# EAGLE board Qwiic_Accelerometer_LIS2DH12-Panel (EAGLE 9.4.2), part 1 of 2
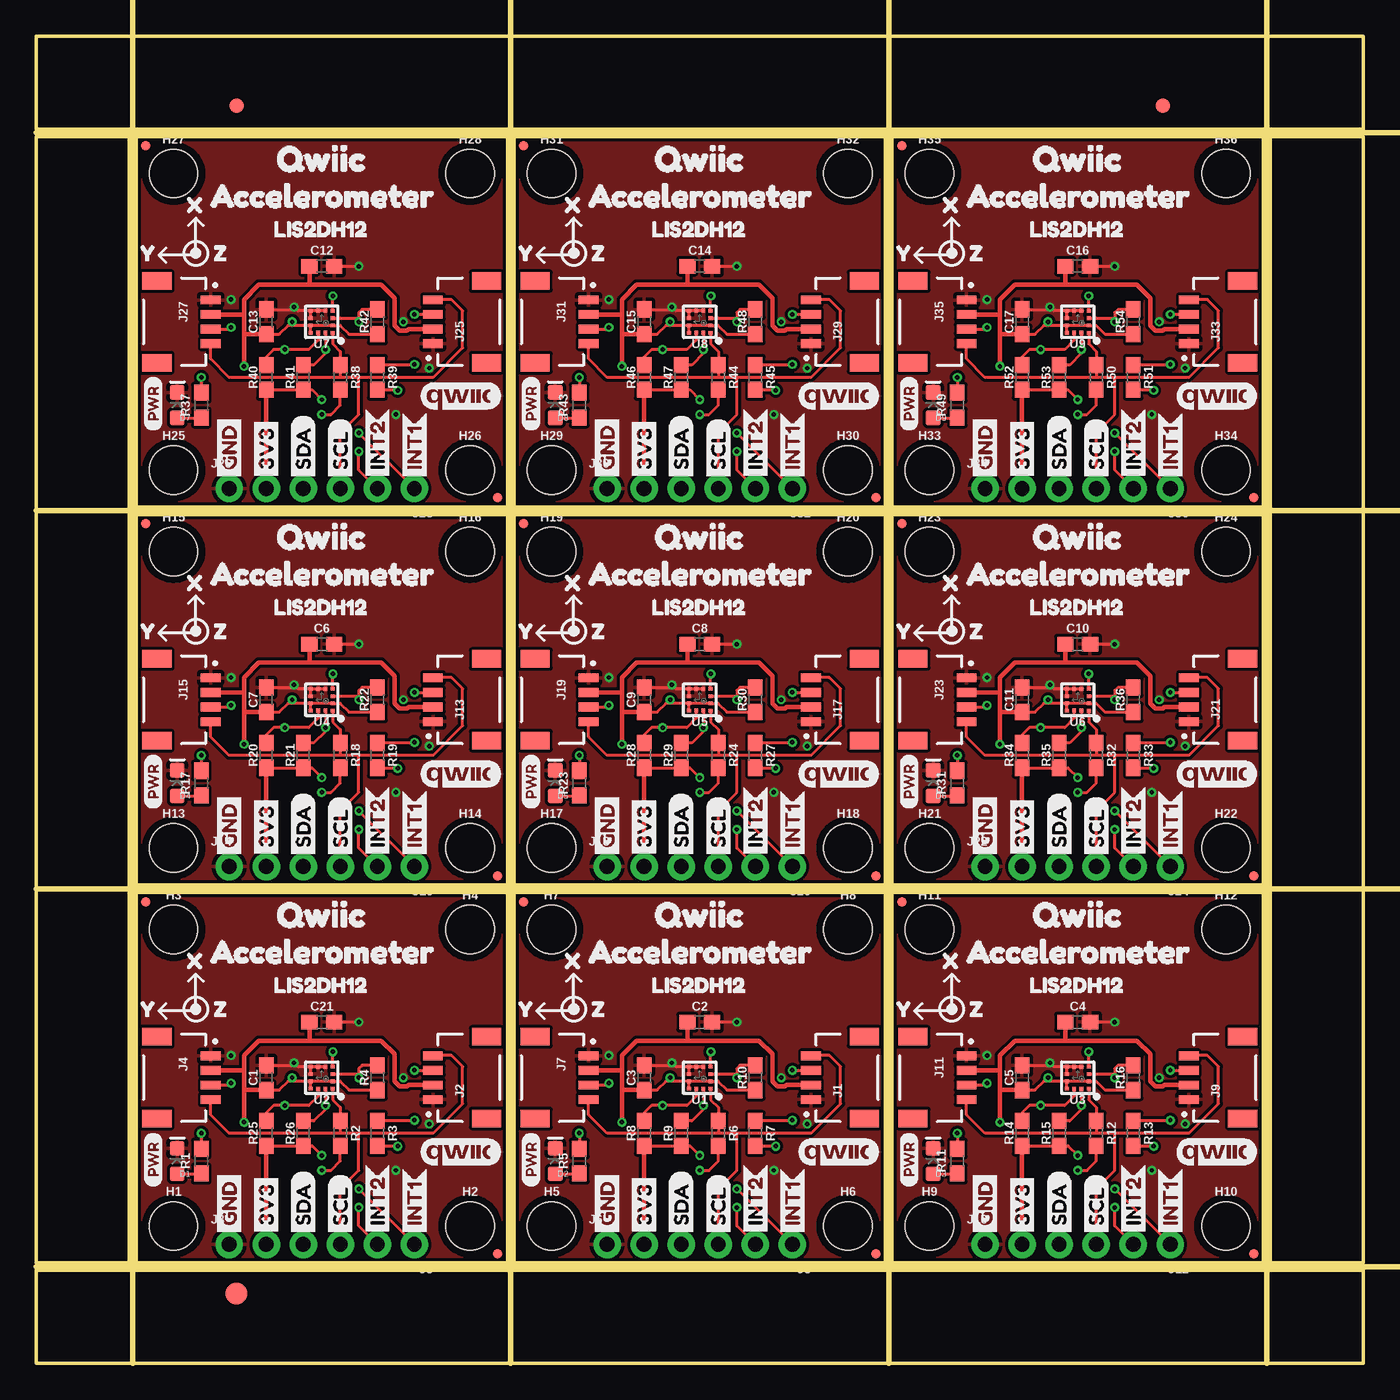
[diagram p0: board, top side]
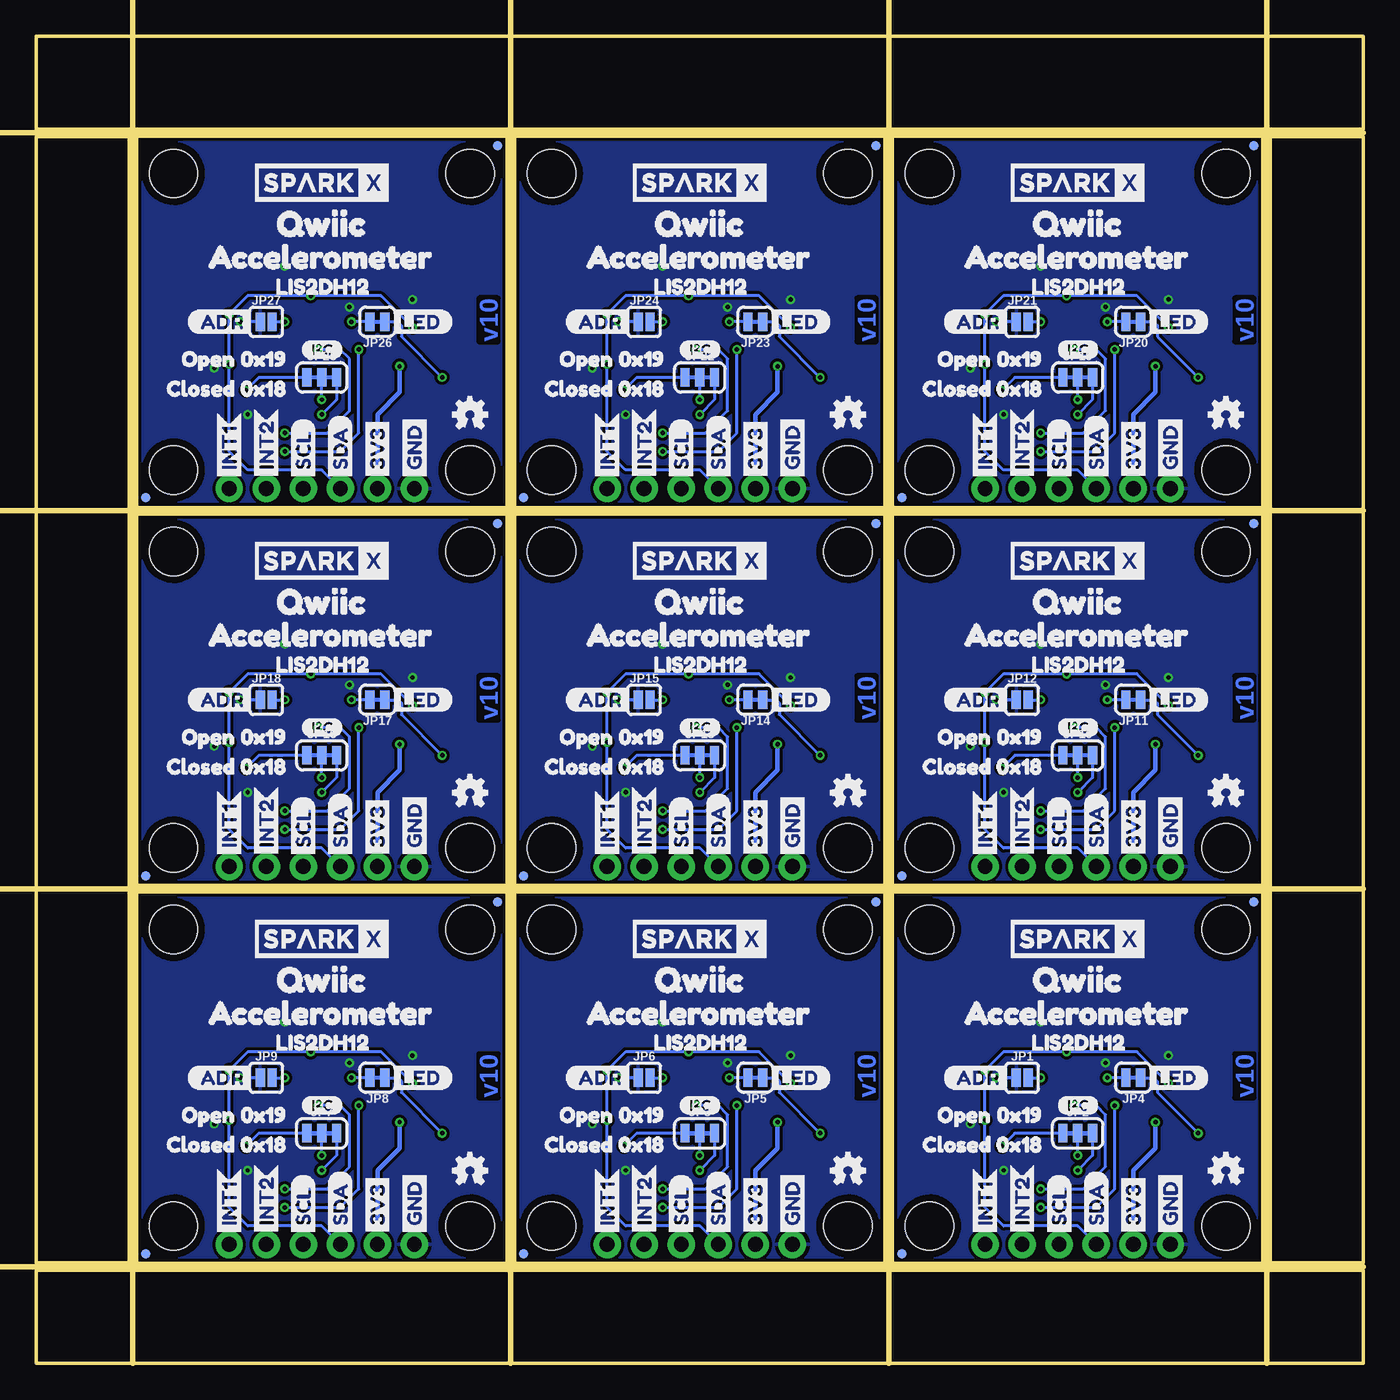
[diagram p1: board, bottom side, seen from below]

Size 90.93 x 90.93 mm. Coordinates in mm from the lower left corner, seen from the top.
Outline: 32.26,6.86 6.86,6.86 6.86,32.26 32.26,32.26 32.26,6.86
Outline: 58.17,6.86 32.77,6.86 32.77,32.26 58.17,32.26 58.17,6.86
Outline: 84.07,6.86 58.67,6.86 58.67,32.26 84.07,32.26 84.07,6.86
Outline: 32.26,32.77 6.86,32.77 6.86,58.17 32.26,58.17 32.26,32.77
Outline: 58.17,32.77 32.77,32.77 32.77,58.17 58.17,58.17 58.17,32.77
Outline: 84.07,32.77 58.67,32.77 58.67,58.17 84.07,58.17 84.07,32.77
Outline: 32.26,58.67 6.86,58.67 6.86,84.07 32.26,84.07 32.26,58.67
Outline: 58.17,58.67 32.77,58.67 32.77,84.07 58.17,84.07 58.17,58.67
Outline: 84.07,58.67 58.67,58.67 58.67,84.07 84.07,84.07 84.07,58.67
Outline: 0,6.35 90.93,6.35 90.93,0 0,0 0,6.35
Outline: 84.58,84.07 90.93,84.07 90.93,6.86 84.58,6.86 84.58,84.07
Outline: 0,90.93 90.93,90.93 90.93,84.58 0,84.58 0,90.93
Outline: 0,84.07 6.35,84.07 6.35,6.86 0,6.86 0,84.07
Copper layers (1*16): Top 0.035mm / dielectric 1.5mm / Bottom 0.035mm
Design rules "SparkFun-2-layer-PCBWay-LIMIT": minimum track width 6mil, minimum drill 0.3mm, track to track 6mil, track to pad 6mil, pad to pad 6mil, via to via 6mil, smd to smd 6mil, copper to edge 6mil, drill to drill 6mil, minimum pad ring 6mil, minimum via ring 6mil, stop-mask expansion 4mil, vias tented up to drill 25mil, thermal gap 10mil
Milling: 8 lines

## Footprints (pad centres in the part's own frame; a part is rotated, then mirrored left to right if it is on the bottom)
0603 = smd 1.1 x 1: 1 -0.85,0; 2 0.85,0
LED-0603 = smd 1 x 1: A -0.877,0; C 0.877,0
FIDUCIAL-1X2 = smd 1 x 1: 1 0,0
FIDUCIAL-1.5X3 = smd 1.5 x 1.5: 1 0,0
FIDUCIAL-MICRO = smd 0.635 x 0.635: 1 0,0
STAND-OFF = hole 3.302: 0,0
JST04_1MM_RA = smd 0.6 x 1.35: 1 -1.5,0; 2 -0.5,0; 3 0.5,0; 4 1.5,0 | smd 1.2 x 2: NC1 2.8,-3.675; NC2 -2.8,-3.675
1X04_NO_SILK = drill 1.016 pad 1.88: 1 0,0; 2 2.54,0; 3 5.08,0; 4 7.62,0
1X02_NO_SILK = drill 1.016 pad 1.88: 1 0,0; 2 2.54,0
SMT-JUMPER_2_NO_SILK = smd 0.635 x 1.27: 1 -0.406,0; 2 0.406,0
SMT-JUMPER_3_2-NC_TRACE_SILK = smd 0.635 x 1.27: 1 -1.016,0; 2 0,0; 3 1.016,0
SMT-JUMPER_2_NC_TRACE_SILK = smd 0.635 x 1.27: 1 -0.508,0; 2 0.508,0
LGA-12-LISDH12 = smd 0.275 x 0.25: 1 -0.75,0.75; 2 -0.75,0.25; 3 -0.75,-0.25; 4 -0.75,-0.75; 7 0.75,-0.75; 8 0.75,-0.25; 9 0.75,0.25; 10 0.75,0.75 | smd 0.25 x 0.275: 5 -0.25,-0.75; 6 0.25,-0.75; 11 0.25,0.75; 12 -0.25,0.75

## Placement (x,y rotation side)
C1  0.1uF  [0603]  15.75,19.56 90 top
C2  10uF  [0603]  45.47,23.37 0 top
C3  0.1uF  [0603]  41.66,19.56 90 top
C4  10uF  [0603]  71.37,23.37 0 top
C5  0.1uF  [0603]  67.56,19.56 90 top
C6  10uF  [0603]  19.56,49.28 0 top
C7  0.1uF  [0603]  15.75,45.47 90 top
C8  10uF  [0603]  45.47,49.28 0 top
C9  0.1uF  [0603]  41.66,45.47 90 top
C10  10uF  [0603]  71.37,49.28 0 top
C11  0.1uF  [0603]  67.56,45.47 90 top
C12  10uF  [0603]  19.56,75.18 0 top
C13  0.1uF  [0603]  15.75,71.37 90 top
C14  10uF  [0603]  45.47,75.18 0 top
C15  0.1uF  [0603]  41.66,71.37 90 top
C16  10uF  [0603]  71.37,75.18 0 top
C17  0.1uF  [0603]  67.56,71.37 90 top
C21  10uF  [0603]  19.56,23.37 0 top
D1  RED  [LED-0603]  9.65,13.84 90 top
D2  RED  [LED-0603]  35.56,13.84 90 top
D3  RED  [LED-0603]  61.47,13.84 90 top
D4  RED  [LED-0603]  9.65,39.75 90 top
D5  RED  [LED-0603]  35.56,39.75 90 top
D6  RED  [LED-0603]  61.47,39.75 90 top
D7  RED  [LED-0603]  9.65,65.66 90 top
D8  RED  [LED-0603]  35.56,65.66 90 top
D9  RED  [LED-0603]  61.47,65.66 90 top
E$1  [FIDUCIAL-1X2]  13.72,86.17 0 top
E$2  [FIDUCIAL-1X2]  77.22,86.17 0 top
E$3  [FIDUCIAL-1.5X3]  13.72,4.76 0 top
FD1  FIDUCIALUFIDUCIAL  [FIDUCIAL-MICRO]  7.49,31.62 0 top
FD2  FIDUCIALUFIDUCIAL  [FIDUCIAL-MICRO]  31.62,7.49 0 top
FD3  FIDUCIALUFIDUCIAL  [FIDUCIAL-MICRO]  31.62,7.49 0 bottom
FD4  FIDUCIALUFIDUCIAL  [FIDUCIAL-MICRO]  7.49,31.62 0 bottom
FD5  FIDUCIALUFIDUCIAL  [FIDUCIAL-MICRO]  33.4,31.62 0 top
FD6  FIDUCIALUFIDUCIAL  [FIDUCIAL-MICRO]  57.53,7.49 0 top
FD7  FIDUCIALUFIDUCIAL  [FIDUCIAL-MICRO]  57.53,7.49 0 bottom
FD8  FIDUCIALUFIDUCIAL  [FIDUCIAL-MICRO]  33.4,31.62 0 bottom
FD9  FIDUCIALUFIDUCIAL  [FIDUCIAL-MICRO]  59.31,31.62 0 top
FD10  FIDUCIALUFIDUCIAL  [FIDUCIAL-MICRO]  83.44,7.49 0 top
FD11  FIDUCIALUFIDUCIAL  [FIDUCIAL-MICRO]  83.44,7.49 0 bottom
FD12  FIDUCIALUFIDUCIAL  [FIDUCIAL-MICRO]  59.31,31.62 0 bottom
FD13  FIDUCIALUFIDUCIAL  [FIDUCIAL-MICRO]  7.49,57.53 0 top
FD14  FIDUCIALUFIDUCIAL  [FIDUCIAL-MICRO]  31.62,33.4 0 top
FD15  FIDUCIALUFIDUCIAL  [FIDUCIAL-MICRO]  31.62,33.4 0 bottom
FD16  FIDUCIALUFIDUCIAL  [FIDUCIAL-MICRO]  7.49,57.53 0 bottom
FD17  FIDUCIALUFIDUCIAL  [FIDUCIAL-MICRO]  33.4,57.53 0 top
FD18  FIDUCIALUFIDUCIAL  [FIDUCIAL-MICRO]  57.53,33.4 0 top
FD19  FIDUCIALUFIDUCIAL  [FIDUCIAL-MICRO]  57.53,33.4 0 bottom
FD20  FIDUCIALUFIDUCIAL  [FIDUCIAL-MICRO]  33.4,57.53 0 bottom
FD21  FIDUCIALUFIDUCIAL  [FIDUCIAL-MICRO]  59.31,57.53 0 top
FD22  FIDUCIALUFIDUCIAL  [FIDUCIAL-MICRO]  83.44,33.4 0 top
FD23  FIDUCIALUFIDUCIAL  [FIDUCIAL-MICRO]  83.44,33.4 0 bottom
FD24  FIDUCIALUFIDUCIAL  [FIDUCIAL-MICRO]  59.31,57.53 0 bottom
FD25  FIDUCIALUFIDUCIAL  [FIDUCIAL-MICRO]  7.49,83.44 0 top
FD26  FIDUCIALUFIDUCIAL  [FIDUCIAL-MICRO]  31.62,59.31 0 top
FD27  FIDUCIALUFIDUCIAL  [FIDUCIAL-MICRO]  31.62,59.31 0 bottom
FD28  FIDUCIALUFIDUCIAL  [FIDUCIAL-MICRO]  7.49,83.44 0 bottom
FD29  FIDUCIALUFIDUCIAL  [FIDUCIAL-MICRO]  33.4,83.44 0 top
FD30  FIDUCIALUFIDUCIAL  [FIDUCIAL-MICRO]  57.53,59.31 0 top
FD31  FIDUCIALUFIDUCIAL  [FIDUCIAL-MICRO]  57.53,59.31 0 bottom
FD32  FIDUCIALUFIDUCIAL  [FIDUCIAL-MICRO]  33.4,83.44 0 bottom
FD33  FIDUCIALUFIDUCIAL  [FIDUCIAL-MICRO]  59.31,83.44 0 top
FD34  FIDUCIALUFIDUCIAL  [FIDUCIAL-MICRO]  83.44,59.31 0 top
FD35  FIDUCIALUFIDUCIAL  [FIDUCIAL-MICRO]  83.44,59.31 0 bottom
FD36  FIDUCIALUFIDUCIAL  [FIDUCIAL-MICRO]  59.31,83.44 0 bottom
H1  STAND-OFF  [STAND-OFF]  9.4,9.4 0 top
H2  STAND-OFF  [STAND-OFF]  29.72,9.4 0 top
H3  STAND-OFF  [STAND-OFF]  9.4,29.72 0 top
H4  STAND-OFF  [STAND-OFF]  29.72,29.72 0 top
H5  STAND-OFF  [STAND-OFF]  35.31,9.4 0 top
H6  STAND-OFF  [STAND-OFF]  55.63,9.4 0 top
H7  STAND-OFF  [STAND-OFF]  35.31,29.72 0 top
H8  STAND-OFF  [STAND-OFF]  55.63,29.72 0 top
H9  STAND-OFF  [STAND-OFF]  61.21,9.4 0 top
H10  STAND-OFF  [STAND-OFF]  81.53,9.4 0 top
H11  STAND-OFF  [STAND-OFF]  61.21,29.72 0 top
H12  STAND-OFF  [STAND-OFF]  81.53,29.72 0 top
H13  STAND-OFF  [STAND-OFF]  9.4,35.31 0 top
H14  STAND-OFF  [STAND-OFF]  29.72,35.31 0 top
H15  STAND-OFF  [STAND-OFF]  9.4,55.63 0 top
H16  STAND-OFF  [STAND-OFF]  29.72,55.63 0 top
H17  STAND-OFF  [STAND-OFF]  35.31,35.31 0 top
H18  STAND-OFF  [STAND-OFF]  55.63,35.31 0 top
H19  STAND-OFF  [STAND-OFF]  35.31,55.63 0 top
H20  STAND-OFF  [STAND-OFF]  55.63,55.63 0 top
H21  STAND-OFF  [STAND-OFF]  61.21,35.31 0 top
H22  STAND-OFF  [STAND-OFF]  81.53,35.31 0 top
H23  STAND-OFF  [STAND-OFF]  61.21,55.63 0 top
H24  STAND-OFF  [STAND-OFF]  81.53,55.63 0 top
H25  STAND-OFF  [STAND-OFF]  9.4,61.21 0 top
H26  STAND-OFF  [STAND-OFF]  29.72,61.21 0 top
H27  STAND-OFF  [STAND-OFF]  9.4,81.53 0 top
H28  STAND-OFF  [STAND-OFF]  29.72,81.53 0 top
H29  STAND-OFF  [STAND-OFF]  35.31,61.21 0 top
H30  STAND-OFF  [STAND-OFF]  55.63,61.21 0 top
H31  STAND-OFF  [STAND-OFF]  35.31,81.53 0 top
H32  STAND-OFF  [STAND-OFF]  55.63,81.53 0 top
H33  STAND-OFF  [STAND-OFF]  61.21,61.21 0 top
H34  STAND-OFF  [STAND-OFF]  81.53,61.21 0 top
H35  STAND-OFF  [STAND-OFF]  61.21,81.53 0 top
H36  STAND-OFF  [STAND-OFF]  81.53,81.53 0 top
J1  Qwiic Right Angle  [JST04_1MM_RA]  53.09,19.56 90 top
J2  Qwiic Right Angle  [JST04_1MM_RA]  27.18,19.56 90 top
J3  PTH  [1X04_NO_SILK]  13.21,8.13 0 top
J4  Qwiic Right Angle  [JST04_1MM_RA]  11.94,19.56 270 top
J5  [1X02_NO_SILK]  25.91,8.13 180 top
J6  PTH  [1X04_NO_SILK]  39.12,8.13 0 top
J7  Qwiic Right Angle  [JST04_1MM_RA]  37.85,19.56 270 top
J8  [1X02_NO_SILK]  51.82,8.13 180 top
J9  Qwiic Right Angle  [JST04_1MM_RA]  78.99,19.56 90 top
J10  PTH  [1X04_NO_SILK]  65.02,8.13 0 top
J11  Qwiic Right Angle  [JST04_1MM_RA]  63.75,19.56 270 top
J12  [1X02_NO_SILK]  77.72,8.13 180 top
J13  Qwiic Right Angle  [JST04_1MM_RA]  27.18,45.47 90 top
J14  PTH  [1X04_NO_SILK]  13.21,34.04 0 top
J15  Qwiic Right Angle  [JST04_1MM_RA]  11.94,45.47 270 top
J16  [1X02_NO_SILK]  25.91,34.04 180 top
J17  Qwiic Right Angle  [JST04_1MM_RA]  53.09,45.47 90 top
J18  PTH  [1X04_NO_SILK]  39.12,34.04 0 top
J19  Qwiic Right Angle  [JST04_1MM_RA]  37.85,45.47 270 top
J20  [1X02_NO_SILK]  51.82,34.04 180 top
J21  Qwiic Right Angle  [JST04_1MM_RA]  78.99,45.47 90 top
J22  PTH  [1X04_NO_SILK]  65.02,34.04 0 top
J23  Qwiic Right Angle  [JST04_1MM_RA]  63.75,45.47 270 top
J24  [1X02_NO_SILK]  77.72,34.04 180 top
J25  Qwiic Right Angle  [JST04_1MM_RA]  27.18,71.37 90 top
J26  PTH  [1X04_NO_SILK]  13.21,59.94 0 top
J27  Qwiic Right Angle  [JST04_1MM_RA]  11.94,71.37 270 top
J28  [1X02_NO_SILK]  25.91,59.94 180 top
J29  Qwiic Right Angle  [JST04_1MM_RA]  53.09,71.37 90 top
J30  PTH  [1X04_NO_SILK]  39.12,59.94 0 top
J31  Qwiic Right Angle  [JST04_1MM_RA]  37.85,71.37 270 top
J32  [1X02_NO_SILK]  51.82,59.94 180 top
J33  Qwiic Right Angle  [JST04_1MM_RA]  78.99,71.37 90 top
J34  PTH  [1X04_NO_SILK]  65.02,59.94 0 top
J35  Qwiic Right Angle  [JST04_1MM_RA]  63.75,71.37 270 top
J36  [1X02_NO_SILK]  77.72,59.94 180 top
JP1  [SMT-JUMPER_2_NO_SILK]  23.37,19.56 0 bottom
JP2  I2C  [SMT-JUMPER_3_2-NC_TRACE_SILK]  19.56,15.75 0 bottom
JP3  I2C  [SMT-JUMPER_3_2-NC_TRACE_SILK]  45.47,15.75 0 bottom
JP4  [SMT-JUMPER_2_NC_TRACE_SILK]  15.75,19.56 180 bottom
JP5  [SMT-JUMPER_2_NC_TRACE_SILK]  41.66,19.56 180 bottom
JP6  [SMT-JUMPER_2_NO_SILK]  49.28,19.56 0 bottom
JP7  I2C  [SMT-JUMPER_3_2-NC_TRACE_SILK]  71.37,15.75 0 bottom
JP8  [SMT-JUMPER_2_NC_TRACE_SILK]  67.56,19.56 180 bottom
JP9  [SMT-JUMPER_2_NO_SILK]  75.18,19.56 0 bottom
JP10  I2C  [SMT-JUMPER_3_2-NC_TRACE_SILK]  19.56,41.66 0 bottom
JP11  [SMT-JUMPER_2_NC_TRACE_SILK]  15.75,45.47 180 bottom
JP12  [SMT-JUMPER_2_NO_SILK]  23.37,45.47 0 bottom
JP13  I2C  [SMT-JUMPER_3_2-NC_TRACE_SILK]  45.47,41.66 0 bottom
JP14  [SMT-JUMPER_2_NC_TRACE_SILK]  41.66,45.47 180 bottom
JP15  [SMT-JUMPER_2_NO_SILK]  49.28,45.47 0 bottom
JP16  I2C  [SMT-JUMPER_3_2-NC_TRACE_SILK]  71.37,41.66 0 bottom
JP17  [SMT-JUMPER_2_NC_TRACE_SILK]  67.56,45.47 180 bottom
JP18  [SMT-JUMPER_2_NO_SILK]  75.18,45.47 0 bottom
JP19  I2C  [SMT-JUMPER_3_2-NC_TRACE_SILK]  19.56,67.56 0 bottom
JP20  [SMT-JUMPER_2_NC_TRACE_SILK]  15.75,71.37 180 bottom
JP21  [SMT-JUMPER_2_NO_SILK]  23.37,71.37 0 bottom
JP22  I2C  [SMT-JUMPER_3_2-NC_TRACE_SILK]  45.47,67.56 0 bottom
JP23  [SMT-JUMPER_2_NC_TRACE_SILK]  41.66,71.37 180 bottom
JP24  [SMT-JUMPER_2_NO_SILK]  49.28,71.37 0 bottom
JP25  I2C  [SMT-JUMPER_3_2-NC_TRACE_SILK]  71.37,67.56 0 bottom
JP26  [SMT-JUMPER_2_NC_TRACE_SILK]  67.56,71.37 180 bottom
JP27  [SMT-JUMPER_2_NO_SILK]  75.18,71.37 0 bottom
LOGO1  OSHW-LOGOMINI  [OSHW-LOGO-MINI]  9.4,13.21 0 bottom
LOGO2  OSHW-LOGOMINI  [OSHW-LOGO-MINI]  35.31,13.21 0 bottom
LOGO3  QWIIC_LOGO_CONNECTOR  [QWIIC_5.5MM]  54.99,14.48 0 top
LOGO4  QWIIC_LOGO_CONNECTOR  [QWIIC_5.5MM]  29.08,14.48 0 top
LOGO5  OSHW-LOGOMINI  [OSHW-LOGO-MINI]  61.21,13.21 0 bottom
LOGO6  QWIIC_LOGO_CONNECTOR  [QWIIC_5.5MM]  80.9,14.48 0 top
LOGO7  OSHW-LOGOMINI  [OSHW-LOGO-MINI]  9.4,39.12 0 bottom
LOGO8  QWIIC_LOGO_CONNECTOR  [QWIIC_5.5MM]  29.08,40.39 0 top
LOGO9  OSHW-LOGOMINI  [OSHW-LOGO-MINI]  35.31,39.12 0 bottom
LOGO10  QWIIC_LOGO_CONNECTOR  [QWIIC_5.5MM]  54.99,40.39 0 top
LOGO11  OSHW-LOGOMINI  [OSHW-LOGO-MINI]  61.21,39.12 0 bottom
LOGO12  QWIIC_LOGO_CONNECTOR  [QWIIC_5.5MM]  80.9,40.39 0 top
LOGO13  OSHW-LOGOMINI  [OSHW-LOGO-MINI]  9.4,65.02 0 bottom
LOGO14  QWIIC_LOGO_CONNECTOR  [QWIIC_5.5MM]  29.08,66.29 0 top
LOGO15  OSHW-LOGOMINI  [OSHW-LOGO-MINI]  35.31,65.02 0 bottom
LOGO16  QWIIC_LOGO_CONNECTOR  [QWIIC_5.5MM]  54.99,66.29 0 top
LOGO17  OSHW-LOGOMINI  [OSHW-LOGO-MINI]  61.21,65.02 0 bottom
LOGO18  QWIIC_LOGO_CONNECTOR  [QWIIC_5.5MM]  80.9,66.29 0 top
R1  1k  [0603]  11.3,13.84 90 top
R2  2.2k  [0603]  20.83,15.75 270 top
R3  2.2k  [0603]  23.37,15.75 270 top
R4  100k  [0603]  23.37,19.56 90 top
R5  1k  [0603]  37.21,13.84 90 top
R6  2.2k  [0603]  46.74,15.75 270 top
R7  2.2k  [0603]  49.28,15.75 270 top
R8  100k  [0603]  41.66,15.75 90 top
R9  100k  [0603]  44.2,15.75 90 top
R10  100k  [0603]  49.28,19.56 90 top
R11  1k  [0603]  63.12,13.84 90 top
R12  2.2k  [0603]  72.64,15.75 270 top
R13  2.2k  [0603]  75.18,15.75 270 top
R14  100k  [0603]  67.56,15.75 90 top
R15  100k  [0603]  70.1,15.75 90 top
R16  100k  [0603]  75.18,19.56 90 top
R17  1k  [0603]  11.3,39.75 90 top
R18  2.2k  [0603]  20.83,41.66 270 top
R19  2.2k  [0603]  23.37,41.66 270 top
R20  100k  [0603]  15.75,41.66 90 top
R21  100k  [0603]  18.29,41.66 90 top
R22  100k  [0603]  23.37,45.47 90 top
R23  1k  [0603]  37.21,39.75 90 top
R24  2.2k  [0603]  46.74,41.66 270 top
R25  100k  [0603]  15.75,15.75 90 top
R26  100k  [0603]  18.29,15.75 90 top
R27  2.2k  [0603]  49.28,41.66 270 top
R28  100k  [0603]  41.66,41.66 90 top
R29  100k  [0603]  44.2,41.66 90 top
R30  100k  [0603]  49.28,45.47 90 top
R31  1k  [0603]  63.12,39.75 90 top
R32  2.2k  [0603]  72.64,41.66 270 top
R33  2.2k  [0603]  75.18,41.66 270 top
R34  100k  [0603]  67.56,41.66 90 top
R35  100k  [0603]  70.1,41.66 90 top
R36  100k  [0603]  75.18,45.47 90 top
R37  1k  [0603]  11.3,65.66 90 top
R38  2.2k  [0603]  20.83,67.56 270 top
R39  2.2k  [0603]  23.37,67.56 270 top
R40  100k  [0603]  15.75,67.56 90 top
R41  100k  [0603]  18.29,67.56 90 top
R42  100k  [0603]  23.37,71.37 90 top
R43  1k  [0603]  37.21,65.66 90 top
R44  2.2k  [0603]  46.74,67.56 270 top
R45  2.2k  [0603]  49.28,67.56 270 top
R46  100k  [0603]  41.66,67.56 90 top
R47  100k  [0603]  44.2,67.56 90 top
R48  100k  [0603]  49.28,71.37 90 top
R49  1k  [0603]  63.12,65.66 90 top
R50  2.2k  [0603]  72.64,67.56 270 top
R51  2.2k  [0603]  75.18,67.56 270 top
R52  100k  [0603]  67.56,67.56 90 top
R53  100k  [0603]  70.1,67.56 90 top
R54  100k  [0603]  75.18,71.37 90 top
U1  LIS2DH12  [LGA-12-LISDH12]  45.47,19.56 180 top
U2  LIS2DH12  [LGA-12-LISDH12]  19.56,19.56 180 top
U3  LIS2DH12  [LGA-12-LISDH12]  71.37,19.56 180 top
U4  LIS2DH12  [LGA-12-LISDH12]  19.56,45.47 180 top
U5  LIS2DH12  [LGA-12-LISDH12]  45.47,45.47 180 top
U6  LIS2DH12  [LGA-12-LISDH12]  71.37,45.47 180 top
U7  LIS2DH12  [LGA-12-LISDH12]  19.56,71.37 180 top
U8  LIS2DH12  [LGA-12-LISDH12]  45.47,71.37 180 top
U9  LIS2DH12  [LGA-12-LISDH12]  71.37,71.37 180 top
U$1  [SDA-[)]  18.29,8.51 90 top
U$2  [X0]  9.4,27.56 0 top
U$3  [SCL-[)]  20.83,8.51 90 top
U$4  [SDA-[)]  18.29,8.51 90 bottom
U$5  [SCL-[)]  20.83,8.51 90 bottom
U$6  [3V3-04]  15.75,8.51 90 top
U$7  [3V3-04]  15.75,8.51 90 bottom
U$8  [GND-04]  13.21,8.51 90 top
U$9  [GND-04]  13.21,8.51 90 bottom
U$10  [ACCELEROMETER2]  10.54,28.19 0 top
U$11  [INT13]  25.91,8.51 90 top
U$12  [INT13]  25.91,8.51 90 bottom
U$13  [INT24]  23.37,8.51 90 top
U$14  [QWIIC2]  24.13,26.29 0 bottom
U$15  [INT24]  23.37,8.51 90 bottom
U$16  [0X183]  26.04,14.99 0 bottom
U$17  [LIS2DH120]  15.37,25.91 0 top
U$18  [PWR-()-03]  8,12.06 90 top
U$19  [I_SUPER2_C-()-03]  20.95,17.65 0 bottom
U$20  [Y1]  6.22,24.26 0 top
U$21  [Z2]  11.05,24.26 0 top
U$22  [QWIIC2]  14.99,30.73 0 top
U$23  [0X192]  26.04,17.02 0 bottom
U$24  [ADR1]  28.83,19.56 0 bottom
U$25  [CLOSED4]  31.12,14.99 0 bottom
U$26  [OPEN5]  30.1,17.02 0 bottom
U$27  [ACCELEROMETER2]  28.7,24 0 bottom
U$28  [LIS2DH120]  23.62,21.97 0 bottom
U$29  [LED7]  15.11,19.56 0 bottom
U$30  SPARKX-LOGO4  [SPARKX-MEDIUM]  19.56,29.08 0 bottom
U$31  [SDA-[)]  44.2,8.51 90 top
U$32  [SCL-[)]  46.74,8.51 90 top
U$33  [SDA-[)]  44.2,8.51 90 bottom
U$34  [SCL-[)]  46.74,8.51 90 bottom
U$35  [3V3-04]  41.66,8.51 90 top
U$36  [3V3-04]  41.66,8.51 90 bottom
U$37  [GND-04]  39.12,8.51 90 top
U$38  [GND-04]  39.12,8.51 90 bottom
U$39  [PWR-()-03]  33.91,12.06 90 top
U$40  [QWIIC2]  40.89,30.73 0 top
U$41  [I_SUPER2_C-()-03]  46.86,17.65 0 bottom
U$42  [QWIIC2]  50.04,26.29 0 bottom
U$43  [ACCELEROMETER2]  36.45,28.19 0 top
U$44  [INT13]  51.82,8.51 90 top
U$45  [INT13]  51.82,8.51 90 bottom
U$46  [INT24]  49.28,8.51 90 top
U$47  [INT24]  49.28,8.51 90 bottom
U$48  [LIS2DH120]  41.27,25.91 0 top
U$49  [X0]  35.31,27.56 0 top
U$50  [Y1]  32.13,24.26 0 top
U$51  [Z2]  36.96,24.26 0 top
U$52  [0X183]  51.94,14.99 0 bottom
U$53  [0X192]  51.94,17.02 0 bottom
U$54  [ADR1]  54.74,19.56 0 bottom
U$55  [CLOSED4]  57.02,14.99 0 bottom
U$56  [ACCELEROMETER2]  54.61,24 0 bottom
U$57  [LIS2DH120]  49.53,21.97 0 bottom
U$58  [LED7]  41.02,19.56 0 bottom
U$59  [OPEN5]  56.01,17.02 0 bottom
U$60  SPARKX-LOGO4  [SPARKX-MEDIUM]  45.47,29.08 0 bottom
U$61  [SDA-[)]  70.1,8.51 90 top
U$62  [SCL-[)]  72.64,8.51 90 top
U$63  [SDA-[)]  70.1,8.51 90 bottom
U$64  [SCL-[)]  72.64,8.51 90 bottom
U$65  [3V3-04]  67.56,8.51 90 top
U$66  [3V3-04]  67.56,8.51 90 bottom
U$67  [GND-04]  65.02,8.51 90 top
U$68  [GND-04]  65.02,8.51 90 bottom
U$69  [PWR-()-03]  59.82,12.06 90 top
U$70  [QWIIC2]  66.8,30.73 0 top
U$71  [I_SUPER2_C-()-03]  72.77,17.65 0 bottom
U$72  [QWIIC2]  75.95,26.29 0 bottom
U$73  [ACCELEROMETER2]  62.36,28.19 0 top
U$74  [INT13]  77.72,8.51 90 top
U$75  [INT13]  77.72,8.51 90 bottom
U$76  [INT24]  75.18,8.51 90 top
U$77  [INT24]  75.18,8.51 90 bottom
U$78  [LIS2DH120]  67.18,25.91 0 top
U$79  [X0]  61.21,27.56 0 top
U$80  [Y1]  58.04,24.26 0 top
U$81  [Z2]  62.86,24.26 0 top
U$82  [0X183]  77.85,14.99 0 bottom
U$83  [0X192]  77.85,17.02 0 bottom
U$84  [ADR1]  80.65,19.56 0 bottom
U$85  [CLOSED4]  82.93,14.99 0 bottom
U$86  [ACCELEROMETER2]  80.52,24 0 bottom
U$87  [LIS2DH120]  75.44,21.97 0 bottom
U$88  [LED7]  66.93,19.56 0 bottom
U$89  [OPEN5]  81.92,17.02 0 bottom
U$90  SPARKX-LOGO4  [SPARKX-MEDIUM]  71.37,29.08 0 bottom
U$91  [SDA-[)]  18.29,34.42 90 top
U$92  [SCL-[)]  20.83,34.42 90 top
U$93  [SDA-[)]  18.29,34.42 90 bottom
U$94  [SCL-[)]  20.83,34.42 90 bottom
U$95  [3V3-04]  15.75,34.42 90 top
U$96  [3V3-04]  15.75,34.42 90 bottom
U$97  [GND-04]  13.21,34.42 90 top
U$98  [GND-04]  13.21,34.42 90 bottom
U$99  [PWR-()-03]  8,37.97 90 top
U$100  [QWIIC2]  14.99,56.64 0 top
U$101  [I_SUPER2_C-()-03]  20.95,43.56 0 bottom
U$102  [QWIIC2]  24.13,52.2 0 bottom
U$103  [ACCELEROMETER2]  10.54,54.1 0 top
U$104  [INT13]  25.91,34.42 90 top
U$105  [INT13]  25.91,34.42 90 bottom
U$106  [INT24]  23.37,34.42 90 top
U$107  [INT24]  23.37,34.42 90 bottom
U$108  [LIS2DH120]  15.37,51.82 0 top
U$109  [X0]  9.4,53.47 0 top
U$110  [Y1]  6.22,50.16 0 top
U$111  [Z2]  11.05,50.16 0 top
U$112  [0X183]  26.04,40.89 0 bottom
U$113  [0X192]  26.04,42.93 0 bottom
U$114  [ADR1]  28.83,45.47 0 bottom
U$115  [CLOSED4]  31.12,40.89 0 bottom
U$116  [ACCELEROMETER2]  28.7,49.91 0 bottom
U$117  [LIS2DH120]  23.62,47.88 0 bottom
U$118  [LED7]  15.11,45.47 0 bottom
U$119  [OPEN5]  30.1,42.93 0 bottom
U$120  SPARKX-LOGO4  [SPARKX-MEDIUM]  19.56,54.99 0 bottom
U$121  [SDA-[)]  44.2,34.42 90 top
U$122  [SCL-[)]  46.74,34.42 90 top
U$123  [SDA-[)]  44.2,34.42 90 bottom
U$124  [SCL-[)]  46.74,34.42 90 bottom
U$125  [3V3-04]  41.66,34.42 90 top
U$126  [3V3-04]  41.66,34.42 90 bottom
U$127  [GND-04]  39.12,34.42 90 top
U$128  [GND-04]  39.12,34.42 90 bottom
U$129  [PWR-()-03]  33.91,37.97 90 top
U$130  [QWIIC2]  40.89,56.64 0 top
U$131  [I_SUPER2_C-()-03]  46.86,43.56 0 bottom
U$132  [QWIIC2]  50.04,52.2 0 bottom
U$133  [ACCELEROMETER2]  36.45,54.1 0 top
U$134  [INT13]  51.82,34.42 90 top
U$135  [INT13]  51.82,34.42 90 bottom
U$136  [INT24]  49.28,34.42 90 top
U$137  [INT24]  49.28,34.42 90 bottom
U$138  [LIS2DH120]  41.27,51.82 0 top
U$139  [X0]  35.31,53.47 0 top
U$140  [Y1]  32.13,50.16 0 top
U$141  [Z2]  36.96,50.16 0 top
U$142  [0X183]  51.94,40.89 0 bottom
U$143  [0X192]  51.94,42.93 0 bottom
U$144  [ADR1]  54.74,45.47 0 bottom
U$145  [CLOSED4]  57.02,40.89 0 bottom
U$146  [ACCELEROMETER2]  54.61,49.91 0 bottom
U$147  [LIS2DH120]  49.53,47.88 0 bottom
U$148  [LED7]  41.02,45.47 0 bottom
U$149  [OPEN5]  56.01,42.93 0 bottom
U$150  SPARKX-LOGO4  [SPARKX-MEDIUM]  45.47,54.99 0 bottom
U$151  [SDA-[)]  70.1,34.42 90 top
U$152  [SCL-[)]  72.64,34.42 90 top
U$153  [SDA-[)]  70.1,34.42 90 bottom
U$154  [SCL-[)]  72.64,34.42 90 bottom
U$155  [3V3-04]  67.56,34.42 90 top
U$156  [3V3-04]  67.56,34.42 90 bottom
U$157  [GND-04]  65.02,34.42 90 top
U$158  [GND-04]  65.02,34.42 90 bottom
U$159  [PWR-()-03]  59.82,37.97 90 top
U$160  [QWIIC2]  66.8,56.64 0 top
U$161  [I_SUPER2_C-()-03]  72.77,43.56 0 bottom
U$162  [QWIIC2]  75.95,52.2 0 bottom
U$163  [ACCELEROMETER2]  62.36,54.1 0 top
U$164  [INT13]  77.72,34.42 90 top
U$165  [INT13]  77.72,34.42 90 bottom
U$166  [INT24]  75.18,34.42 90 top
U$167  [INT24]  75.18,34.42 90 bottom
U$168  [LIS2DH120]  67.18,51.82 0 top
U$169  [X0]  61.21,53.47 0 top
U$170  [Y1]  58.04,50.16 0 top
U$171  [Z2]  62.86,50.16 0 top
U$172  [0X183]  77.85,40.89 0 bottom
U$173  [0X192]  77.85,42.93 0 bottom
U$174  [ADR1]  80.65,45.47 0 bottom
U$175  [CLOSED4]  82.93,40.89 0 bottom
U$176  [ACCELEROMETER2]  80.52,49.91 0 bottom
U$177  [LIS2DH120]  75.44,47.88 0 bottom
U$178  [LED7]  66.93,45.47 0 bottom
U$179  [OPEN5]  81.92,42.93 0 bottom
U$180  SPARKX-LOGO4  [SPARKX-MEDIUM]  71.37,54.99 0 bottom
U$181  [SDA-[)]  18.29,60.32 90 top
U$182  [SCL-[)]  20.83,60.32 90 top
U$183  [SDA-[)]  18.29,60.32 90 bottom
U$184  [SCL-[)]  20.83,60.32 90 bottom
U$185  [3V3-04]  15.75,60.32 90 top
U$186  [3V3-04]  15.75,60.32 90 bottom
U$187  [GND-04]  13.21,60.32 90 top
U$188  [GND-04]  13.21,60.32 90 bottom
U$189  [PWR-()-03]  8,63.88 90 top
U$190  [QWIIC2]  14.99,82.55 0 top
U$191  [I_SUPER2_C-()-03]  20.95,69.47 0 bottom
U$192  [QWIIC2]  24.13,78.11 0 bottom
U$193  [ACCELEROMETER2]  10.54,80.01 0 top
U$194  [INT13]  25.91,60.32 90 top
U$195  [INT13]  25.91,60.32 90 bottom
U$196  [INT24]  23.37,60.32 90 top
U$197  [INT24]  23.37,60.32 90 bottom
U$198  [LIS2DH120]  15.37,77.72 0 top
U$199  [X0]  9.4,79.38 0 top
U$200  [Y1]  6.22,76.07 0 top
U$201  [Z2]  11.05,76.07 0 top
U$202  [0X183]  26.04,66.8 0 bottom
U$203  [0X192]  26.04,68.83 0 bottom
U$204  [ADR1]  28.83,71.37 0 bottom
U$205  [CLOSED4]  31.12,66.8 0 bottom
U$206  [ACCELEROMETER2]  28.7,75.82 0 bottom
U$207  [LIS2DH120]  23.62,73.79 0 bottom
U$208  [LED7]  15.11,71.37 0 bottom
U$209  [OPEN5]  30.1,68.83 0 bottom
U$210  SPARKX-LOGO4  [SPARKX-MEDIUM]  19.56,80.9 0 bottom
U$211  [SDA-[)]  44.2,60.32 90 top
U$212  [SCL-[)]  46.74,60.32 90 top
U$213  [SDA-[)]  44.2,60.32 90 bottom
U$214  [SCL-[)]  46.74,60.32 90 bottom
U$215  [3V3-04]  41.66,60.32 90 top
U$216  [3V3-04]  41.66,60.32 90 bottom
U$217  [GND-04]  39.12,60.32 90 top
U$218  [GND-04]  39.12,60.32 90 bottom
U$219  [PWR-()-03]  33.91,63.88 90 top
U$220  [QWIIC2]  40.89,82.55 0 top
U$221  [I_SUPER2_C-()-03]  46.86,69.47 0 bottom
U$222  [QWIIC2]  50.04,78.11 0 bottom
U$223  [ACCELEROMETER2]  36.45,80.01 0 top
U$224  [INT13]  51.82,60.32 90 top
U$225  [INT13]  51.82,60.32 90 bottom
U$226  [INT24]  49.28,60.32 90 top
U$227  [INT24]  49.28,60.32 90 bottom
U$228  [LIS2DH120]  41.27,77.72 0 top
U$229  [X0]  35.31,79.38 0 top
U$230  [Y1]  32.13,76.07 0 top
U$231  [Z2]  36.96,76.07 0 top
U$232  [0X183]  51.94,66.8 0 bottom
U$233  [0X192]  51.94,68.83 0 bottom
U$234  [ADR1]  54.74,71.37 0 bottom
U$235  [CLOSED4]  57.02,66.8 0 bottom
U$236  [ACCELEROMETER2]  54.61,75.82 0 bottom
U$237  [LIS2DH120]  49.53,73.79 0 bottom
U$238  [LED7]  41.02,71.37 0 bottom
U$239  [OPEN5]  56.01,68.83 0 bottom
U$240  SPARKX-LOGO4  [SPARKX-MEDIUM]  45.47,80.9 0 bottom
U$241  [SDA-[)]  70.1,60.32 90 top
U$242  [SCL-[)]  72.64,60.32 90 top
U$243  [SDA-[)]  70.1,60.32 90 bottom
U$244  [SCL-[)]  72.64,60.32 90 bottom
U$245  [3V3-04]  67.56,60.32 90 top
U$246  [3V3-04]  67.56,60.32 90 bottom
U$247  [GND-04]  65.02,60.32 90 top
U$248  [GND-04]  65.02,60.32 90 bottom
U$249  [PWR-()-03]  59.82,63.88 90 top
U$250  [QWIIC2]  66.8,82.55 0 top
U$251  [I_SUPER2_C-()-03]  72.77,69.47 0 bottom
U$252  [QWIIC2]  75.95,78.11 0 bottom
U$253  [ACCELEROMETER2]  62.36,80.01 0 top
U$254  [INT13]  77.72,60.32 90 top
U$255  [INT13]  77.72,60.32 90 bottom
U$256  [INT24]  75.18,60.32 90 top
U$257  [INT24]  75.18,60.32 90 bottom
U$258  [LIS2DH120]  67.18,77.72 0 top
U$259  [X0]  61.21,79.38 0 top
U$260  [Y1]  58.04,76.07 0 top
U$261  [Z2]  62.86,76.07 0 top
U$262  [0X183]  77.85,66.8 0 bottom
U$263  [0X192]  77.85,68.83 0 bottom
U$264  [ADR1]  80.65,71.37 0 bottom
U$265  [CLOSED4]  82.93,66.8 0 bottom
U$266  [ACCELEROMETER2]  80.52,75.82 0 bottom
U$267  [LIS2DH120]  75.44,73.79 0 bottom
U$268  [LED7]  66.93,71.37 0 bottom
U$269  [OPEN5]  81.92,68.83 0 bottom
U$270  SPARKX-LOGO4  [SPARKX-MEDIUM]  71.37,80.9 0 bottom

## Library data of the parts
C1 C3 C5 C7 C9 C11 C13 C15 C17 = SparkFun-Capacitors; PROD_ID: CAP-00810
C2 C4 C6 C8 C10 C12 C14 C16 C21 = SparkFun-Capacitors; PROD_ID: CAP-11015
D1-D9 = SparkFun-LED; PROD_ID: DIO-00819
E$1 E$2 FD1-FD36 LOGO1-LOGO18 = SparkFun-Aesthetics
E$3 = SparkFun-Retired
H1-H36 = SparkFun-Hardware
J1 J2 J4 J7 J9 J11 J13 J15 J17 J19 J21 J23 J25 J27 J29 J31 J33 J35 = SparkFun-Connectors; PROD_ID: CONN-13694
J3 J5 J6 J8 J10 J12 J14 J16 J18 J20 J22 J24 J26 J28 J30 J32 J34 J36 = SparkFun-Connectors
JP1-JP27 = SparkFun-Jumpers
R1 R5 R11 R17 R23 R31 R37 R43 R49 = SparkFun-Resistors; PROD_ID: RES-07856
R2 R3 R6 R7 R12 R13 R18 R19 R24 R27 R32 R33 R38 R39 R44 R45 R50 R51 = SparkFun-Resistors; PROD_ID: RES-08272
R4 R8-R10 R14-R16 R20-R22 R25 R26 R28-R30 R34-R36 R40-R42 R46-R48 R52-R54 = SparkFun-Resistors; PROD_ID: RES-07828
U1-U9 = SparkFun-Sensors; DIGIKEY: 497-14851-2-ND; PROD_ID: IC-14229
U$1 U$3-U$9 U$18 U$19 U$31-U$39 U$41 U$61-U$69 U$71 U$91-U$99 U$101 U$121-U$129 U$131 U$151-U$159 U$161 U$181-U$189 U$191 U$211-U$219 U$221 U$241-U$249 U$251 = Labels
U$2 U$20 U$21 U$49-U$51 U$79-U$81 U$109-U$111 U$139-U$141 U$169-U$171 U$199-U$201 U$229-U$231 U$259-U$261 = buzzard_labels (5)
U$10-U$13 U$15 U$17 U$27 U$28 U$43-U$48 U$56 U$57 U$73-U$78 U$86 U$87 U$103-U$108 U$116 U$117 U$133-U$138 U$146 U$147 U$163-U$168 U$176 U$177 U$193-U$198 U$206 U$207 U$223-U$228 U$236 U$237 U$253-U$258 U$266 U$267 = buzzard_labels (4)
U$14 U$22 U$40 U$42 U$70 U$72 U$100 U$102 U$130 U$132 U$160 U$162 U$190 U$192 U$220 U$222 U$250 U$252 = buzzard_labels (68)
U$16 U$23-U$25 U$52-U$55 U$82-U$85 U$112-U$115 U$142-U$145 U$172-U$175 U$202-U$205 U$232-U$235 U$262-U$265 = buzzard_labels (6)
U$26 U$29 U$58 U$59 U$88 U$89 U$118 U$119 U$148 U$149 U$178 U$179 U$208 U$209 U$238 U$239 U$268 U$269 = buzzard_labels (7)
U$30 U$60 U$90 U$120 U$150 U$180 U$210 U$240 U$270 = SparkX

## Nets
3.3V: C1.1 C21.1 J2.2 J3.2 J4.2 JP2.2 JP4.2 R4.1 R25.1 R26.1 U2.2 U2.9 U2.10
3.3V1: C2.1 C3.1 J1.2 J6.2 J7.2 JP3.2 JP5.2 R8.1 R9.1 R10.1 U1.2 U1.9 U1.10
3.3V2: C4.1 C5.1 J9.2 J10.2 J11.2 JP7.2 JP8.2 R14.1 R15.1 R16.1 U3.2 U3.9 U3.10
3.3V3: C6.1 C7.1 J13.2 J14.2 J15.2 JP10.2 JP11.2 R20.1 R21.1 R22.1 U4.2 U4.9 U4.10
3.3V4: C8.1 C9.1 J17.2 J18.2 J19.2 JP13.2 JP14.2 R28.1 R29.1 R30.1 U5.2 U5.9 U5.10
3.3V5: C10.1 C11.1 J21.2 J22.2 J23.2 JP16.2 JP17.2 R34.1 R35.1 R36.1 U6.2 U6.9 U6.10
3.3V6: C12.1 C13.1 J25.2 J26.2 J27.2 JP19.2 JP20.2 R40.1 R41.1 R42.1 U7.2 U7.9 U7.10
3.3V7: C14.1 C15.1 J29.2 J30.2 J31.2 JP22.2 JP23.2 R46.1 R47.1 R48.1 U8.2 U8.9 U8.10
3.3V8: C16.1 C17.1 J33.2 J34.2 J35.2 JP25.2 JP26.2 R52.1 R53.1 R54.1 U9.2 U9.9 U9.10
GND: C1.2 C21.2 D1.C J2.1 J3.1 J4.1 JP1.1 U2.5 U2.6 U2.7 U2.8
GND1: C2.2 C3.2 D2.C J1.1 J6.1 J7.1 JP6.1 U1.5 U1.6 U1.7 U1.8
GND2: C4.2 C5.2 D3.C J9.1 J10.1 J11.1 JP9.1 U3.5 U3.6 U3.7 U3.8
GND3: C6.2 C7.2 D4.C J13.1 J14.1 J15.1 JP12.1 U4.5 U4.6 U4.7 U4.8
GND4: C8.2 C9.2 D5.C J17.1 J18.1 J19.1 JP15.1 U5.5 U5.6 U5.7 U5.8
GND5: C10.2 C11.2 D6.C J21.1 J22.1 J23.1 JP18.1 U6.5 U6.6 U6.7 U6.8
GND6: C12.2 C13.2 D7.C J25.1 J26.1 J27.1 JP21.1 U7.5 U7.6 U7.7 U7.8
GND7: C14.2 C15.2 D8.C J29.1 J30.1 J31.1 JP24.1 U8.5 U8.6 U8.7 U8.8
GND8: C16.2 C17.2 D9.C J33.1 J34.1 J35.1 JP27.1 U9.5 U9.6 U9.7 U9.8
INT1: J5.1 R26.2 U2.12
INT2: J5.2 R25.2 U2.11
INT3: J8.1 R9.2 U1.12
INT4: J8.2 R8.2 U1.11
INT5: J12.1 R15.2 U3.12
INT6: J12.2 R14.2 U3.11
INT7: J16.1 R21.2 U4.12
INT8: J16.2 R20.2 U4.11
INT9: J20.1 R29.2 U5.12
INT10: J20.2 R28.2 U5.11
INT11: J24.1 R35.2 U6.12
INT12: J24.2 R34.2 U6.11
INT13: J28.1 R41.2 U7.12
INT14: J28.2 R40.2 U7.11
INT15: J32.1 R47.2 U8.12
INT16: J32.2 R46.2 U8.11
INT17: J36.1 R53.2 U9.12
INT18: J36.2 R52.2 U9.11
N$1: JP4.1 R1.2
N$2: JP2.1 R3.2
N$3: JP2.3 R2.2
N$4: JP1.2 R4.2 U2.3
N$5: D2.A R5.1
N$6: JP3.1 R7.2
N$7: JP3.3 R6.2
N$8: JP5.1 R5.2
N$9: JP6.2 R10.2 U1.3
N$10: D1.A R1.1
N$11: D3.A R11.1
N$12: JP7.1 R13.2
N$13: JP7.3 R12.2
N$14: JP8.1 R11.2
N$15: JP9.2 R16.2 U3.3
N$16: D4.A R17.1
N$17: JP10.1 R19.2
N$18: JP10.3 R18.2
N$19: JP11.1 R17.2
N$20: JP12.2 R22.2 U4.3
N$21: D5.A R23.1
N$22: JP13.1 R27.2
N$23: JP13.3 R24.2
N$24: JP14.1 R23.2
N$25: JP15.2 R30.2 U5.3
N$26: D6.A R31.1
N$27: JP16.1 R33.2
N$28: JP16.3 R32.2
N$29: JP17.1 R31.2
N$30: JP18.2 R36.2 U6.3
N$31: D7.A R37.1
N$32: JP19.1 R39.2
N$33: JP19.3 R38.2
N$34: JP20.1 R37.2
N$35: JP21.2 R42.2 U7.3
N$36: D8.A R43.1
N$37: JP22.1 R45.2
N$38: JP22.3 R44.2
N$39: JP23.1 R43.2
N$40: JP24.2 R48.2 U8.3
N$41: D9.A R49.1
N$42: JP25.1 R51.2
N$43: JP25.3 R50.2
N$44: JP26.1 R49.2
N$45: JP27.2 R54.2 U9.3
SCL: J2.4 J3.4 J4.4 R2.1 U2.1
SCL1: J1.4 J6.4 J7.4 R6.1 U1.1
SCL2: J9.4 J10.4 J11.4 R12.1 U3.1
SCL3: J13.4 J14.4 J15.4 R18.1 U4.1
SCL4: J17.4 J18.4 J19.4 R24.1 U5.1
SCL5: J21.4 J22.4 J23.4 R32.1 U6.1
SCL6: J25.4 J26.4 J27.4 R38.1 U7.1
SCL7: J29.4 J30.4 J31.4 R44.1 U8.1
SCL8: J33.4 J34.4 J35.4 R50.1 U9.1
SDA: J2.3 J3.3 J4.3 R3.1 U2.4
SDA1: J1.3 J6.3 J7.3 R7.1 U1.4
SDA2: J9.3 J10.3 J11.3 R13.1 U3.4
SDA3: J13.3 J14.3 J15.3 R19.1 U4.4
SDA4: J17.3 J18.3 J19.3 R27.1 U5.4
SDA5: J21.3 J22.3 J23.3 R33.1 U6.4
SDA6: J25.3 J26.3 J27.3 R39.1 U7.4
SDA7: J29.3 J30.3 J31.3 R45.1 U8.4
SDA8: J33.3 J34.3 J35.3 R51.1 U9.4